# Altium PCB CL-HC-V2.0.PcbDoc (part 1 of 3)
Units mil, origin at the board's own origin, x right, y up, seen from the top; angles counter-clockwise.
Board outline 12846.15 x 9153.85 mil, 2 copper layers (TopLayer, BottomLayer); 137 components, 528 nets, 534 pads, 1 vias.
Unrouted connection lines stored in the file: 27.
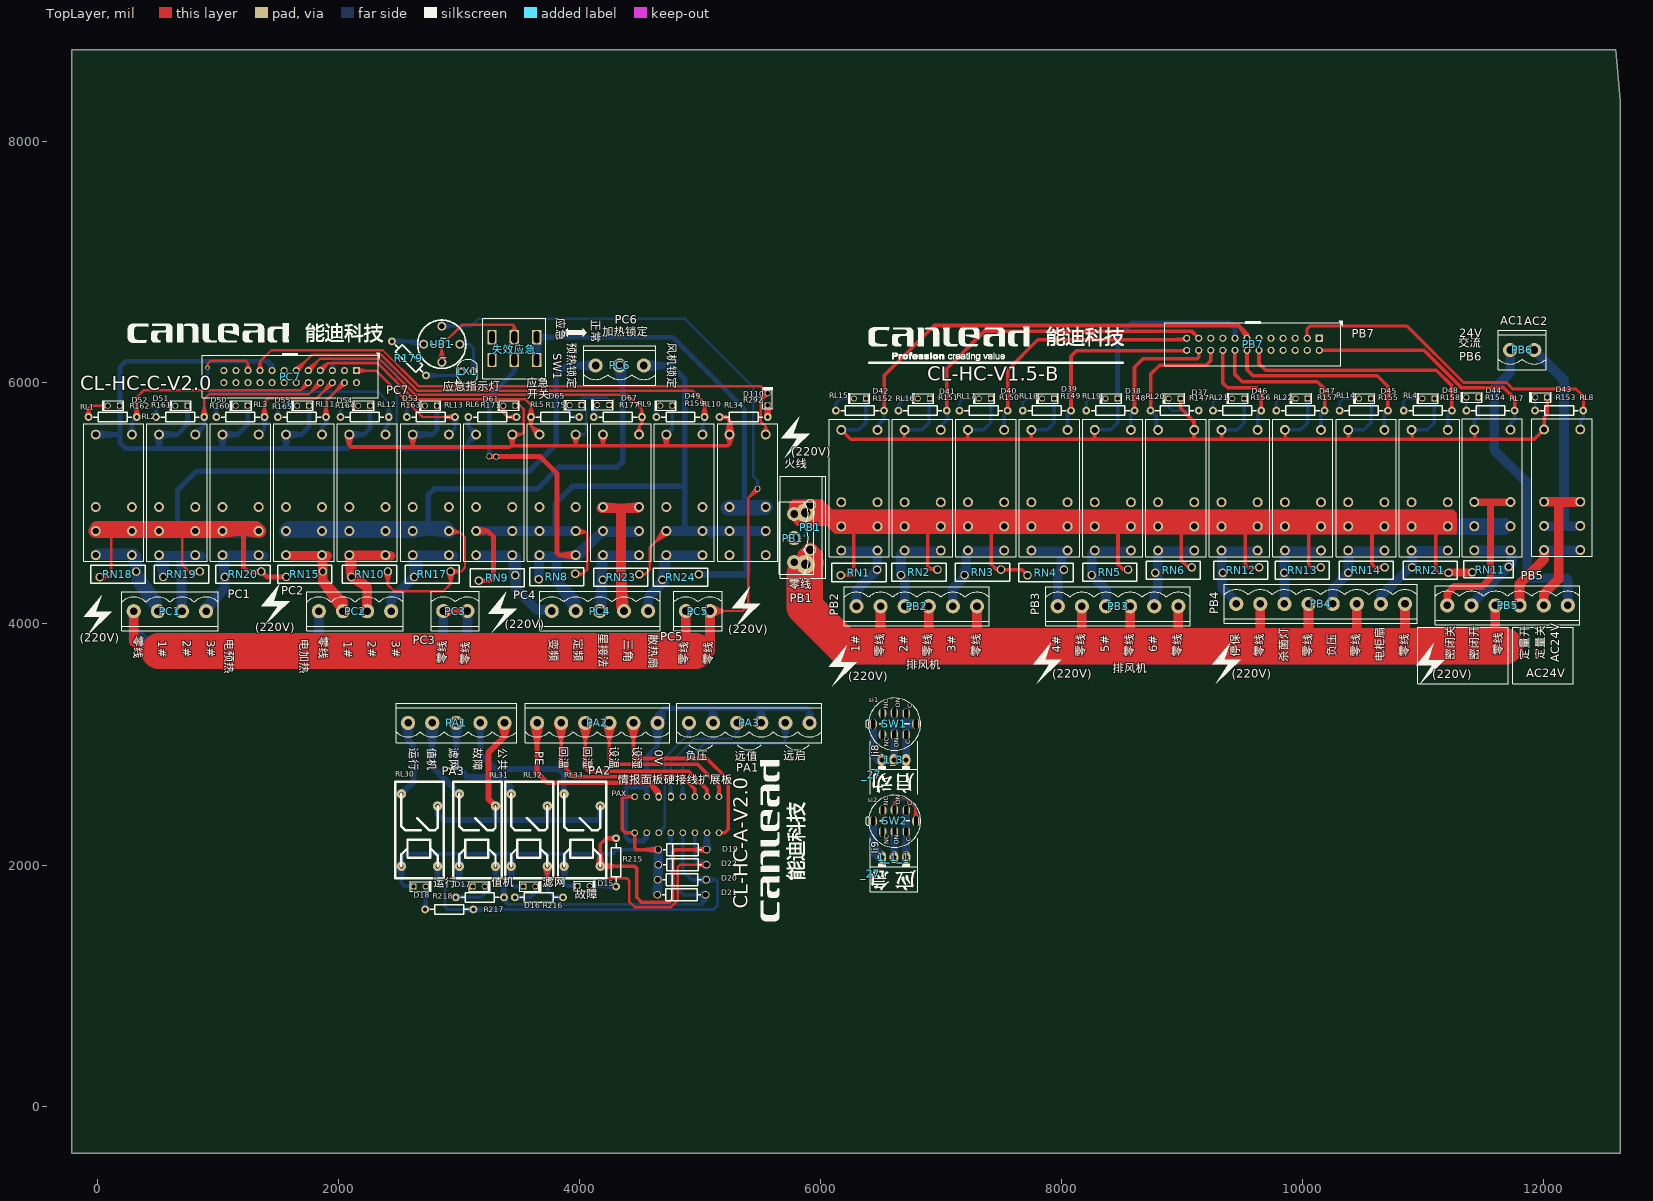
[diagram p0: TopLayer view]
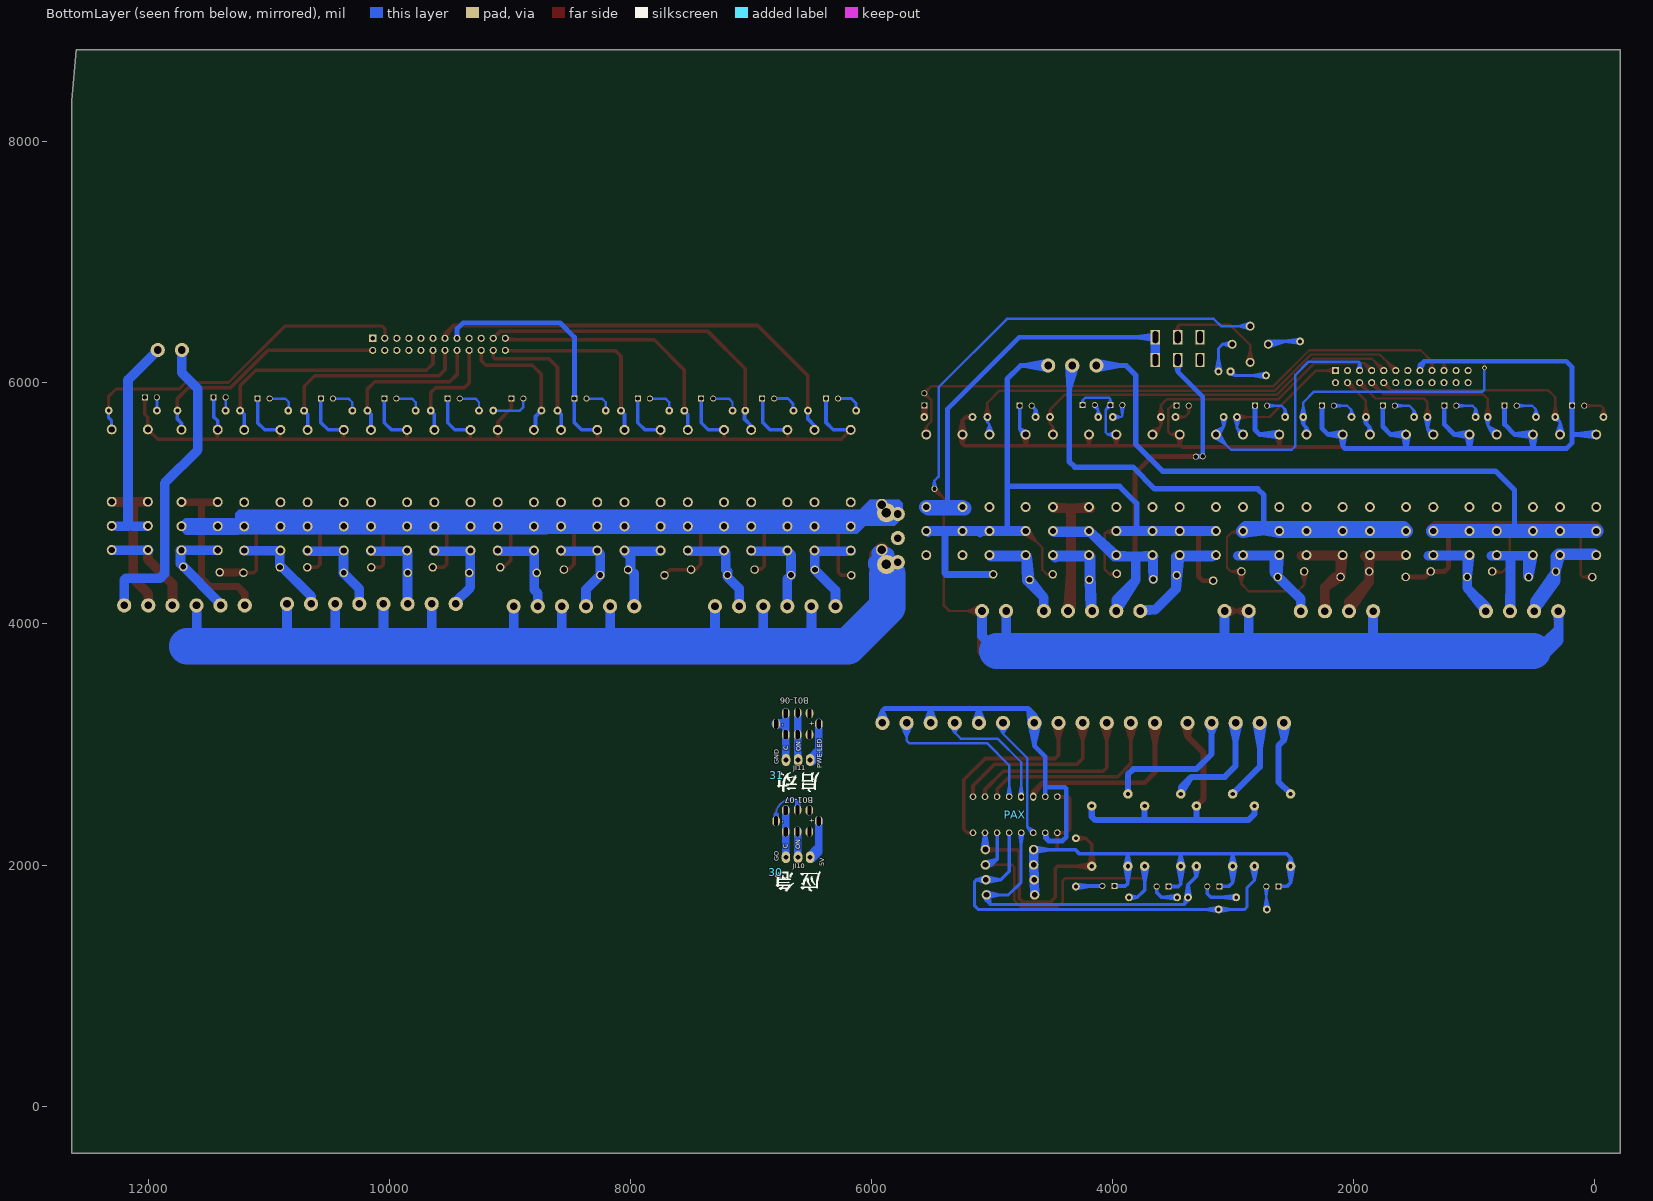
[diagram p1: BottomLayer view, seen from below]

## Layer stack, top to bottom
TopSolder: solder mask 0.4, Solder Resist, Dk 3.5
TopLayer: signal copper 1.4
Dielectric1: dielectric 12.6, FR-4, Dk 4.8
BottomLayer: signal copper 1.4
BottomSolder: solder mask 0.4, Solder Resist, Dk 3.5

## Board outline
12597.31,8763.6 -210.38,8763.6 -210.38,-390.24 12635.77,-390.24 12635.77,8340.52

## Design rules (kind name [scope] priority, off if disabled: settings)
Clearance Clearance_1 [All] p1 off: gap=30
Clearance [All] p2: gap=15
ComponentClearance [All] p1 off: gap=10 collisioncheckmode=3 verticalgap=10 showdistances=FALSE
FabricationTestPointUsage TestPointUsage [All] p1: valid=0 allowmultiple=FALSE
FabricationTestpoint Testpoint [All] p1: side=3 testpointundercomponent=TRUE minsize=40 maxsize=100 preferedsize=60 minholesize=20 maxholesize=40 preferedholesize=32 testpointgrid=1 allowsidetop=TRUE allowsidebottom=TRUE usegrid=TRUE gridtolerance=0.01
PolygonConnect PolygonConnect_1 [All vs (InPadClass('All Pads'))] p1: connectstyle=NoConnect reliefconductorwidth=10 reliefentries=4 polygonreliefangle="90 Angle" airgapwidth=10
PolygonConnect [All] p2: connectstyle=Direct reliefconductorwidth=10 reliefentries=4 polygonreliefangle="90 Angle" airgapwidth=10
RoomDefinition patch [InComponentClass('patch')] p1: confinementstyle=ConfineIn formatcopy=TRUE lockcomponents=FALSE outline -2150,7720.31 -950,7720.31 -950,4279.31 -2150,4279.31
RoomDefinition Lights [InComponentClass('Lights')] p2: confinementstyle=ConfineIn formatcopy=TRUE lockcomponents=FALSE outline 14197.83,3159.45 15242.13,3159.45 15242.13,3920.28 14197.83,3920.28
RoomDefinition MCU单片机 [InComponentClass('MCU单片机')] p3: confinementstyle=ConfineIn formatcopy=TRUE lockcomponents=FALSE outline 15430.12,9928.15 13948.82,9928.15 13948.82,10710.63 15430.12,10710.63
RoutingVias [All] p1: holewidth=24 width=40 viastyle="Through Hole" minholewidth=24 minwidth=40 maxholewidth=24 maxwidth=40
SilkToSolderMaskClearance SilkscreenOverComponentPads [IsPad] p1: minsilkscreentomaskgap=10 clearancetoexposedcopper=TRUE
SolderMaskExpansion [All] p1: expansion=4
Width [All] p1: maxlimit=300 minlimit=10 preferedwidth=30
25 further rules are at their usual default settings.

## Classes and differential pairs
component class Lights: D74 Q11 R118 R194 RN22 Y1 Y2
component class MCU单片机: 1 24V C1 C2 C3 C4 C5 C6 C7 C8 C19 C20 C29 C30 C31 C32 C34 C35 CU1 D1 D2 D3 F F2 P P1 R1 R2 R3 R4 R5 R6 R7 R8 R9 R11 R12 R13 R35 R79 U1 VR1 ѹ? 冷/自/热 定频/变频 客户接线自动门1 情报面 星/三角 电柜内部1 电柜内部2 电柜风扇

## Components (designator, comment, footprint, x,y, rotation, side; value= is the part's Value field where it differs from the comment)
1_1_1 "J15" 3p 6610.71,2103.68 r180 top
1_3 "J15" 3p 6610.32,2910.76 r180 top
30 "" place-han_zi_z 6793.7,1938.87 r180 bottom
31 "" place-han_zi_z 6785.83,2745.96 r180 bottom
_27 "" place-han_zi_z 6427.56,2749.9 r0 top
_27 "" place-han_zi_z 6419.68,1927.06 r0 top
D15 "" RT_LED1 4035.83,1826.11 r180 top (schematic designator D64)
D16 "" RT_LED1 3585.83,1822.22 r180 top (schematic designator D63)
D17 "" RT_LED1 3165.83,1822.74 r180 top (schematic designator D62)
D18 "" RT_LED1 2675.83,1822.74 r180 top (schematic designator D59)
D19 "1n4007" DIODEAK 4856.28,2128.21 r180 top (schematic designator D70)
D20 "1n4007" DIODEAK 4852.32,1877.75 r180 top (schematic designator D69)
D21 "1n4007" DIODEAK 4848.08,1752.53 r180 top (schematic designator D4)
D22 "1n4007" DIODEAK 4856.28,2001.4 r180 top (schematic designator D68)
D37 "GREEN" RT_LED1 8938.5,5869.33 r0 top
D38 "GREEN" RT_LED1 8415.4,5869.33 r0 top
D39 "GREEN" RT_LED1 7889.77,5869.33 r0 top
D40 "GREEN" RT_LED1 7364.14,5869.33 r0 top
D41 "GREEN" RT_LED1 6858.5,5869.33 r0 top
D42 "RED" RT_LED1 6328.5,5869.33 r0 top
D43 "GREEN" RT_LED1 11978.5,5879.33 r0 top
D44 "GREEN" RT_LED1 11408.5,5879.33 r0 top
D45 "GREEN" RT_LED1 10517.93,5869.33 r0 top
D46 "" RT_LED1 9466.67,5869.33 r0 top
D47 "GREEN" RT_LED1 9992.3,5869.33 r0 top
D48 "GREEN" RT_LED1 11043.56,5869.33 r0 top
D49 "GREEN" RT_LED1 4722.2,5810 r0 top locked
D50 "GREEN" RT_LED1 1200,5810 r0 top locked
D51 "" RT_LED1 700,5810 r0 top locked
D52 "GREEN" RT_LED1 140,5810 r0 top locked
D53 "GREEN" RT_LED1 2770,5810 r0 top locked
D54 "GREEN" RT_LED1 2215.64,5810 r0 top locked
D55 "GREEN" RT_LED1 1710,5810 r0 top locked
D61 "GREEN" RT_LED1 3420,5810 r0 top locked
D65 "GREEN" RT_LED1 3970,5815 r0 top locked
D67 "GREEN" RT_LED1 4199.27,5815.92 r0 top locked
D110 "GREEN" RT_LED1 5563.38,5863.45 r270 top
LX1 "" LEDA 3023.66,6094.87 r180 top locked (schematic designator 红?)
PA1 "情报面板与电柜输入" pl5x 2980.44,3178.9 r0 top (schematic designator 外?)
PA2 "模拟-硬连接" PL6X 4150.11,3178.9 r180 top (schematic designator 外?)
PA3 "外接情报面板接口1" PL6X 5410.44,3178.9 r0 top
PAX "Header 8X2" centipede-16 4809.58,2417.3 r90 bottom (schematic designator P19)
PB1 "硬接线" 95-2P 5915.74,4614.99 r90 top (schematic designator AC24Vin2)
PB1' "硬接线" PL3X 5782.6,4512.08 r90 top (schematic designator 客户接线1)
PB2 "Header 6" PL6X 6799.43,4146.34 r0 top (schematic designator 客户接线2)
PB3 "Header 6" PL6X 8469.43,4146.34 r0 top (schematic designator 客户接线3)
PB4 "Header 8" PL8X 10149.43,4166.34 r0 top (schematic designator 杀菌/停保)
PB5 "硬接线" PL6X 11700.08,4153.96 r0 top (schematic designator 客接新?)
PB6 "硬接线" PL2X 11821.07,6272.28 r180 top (schematic designator AC24Vin2)
PB7 "Con2*12-1mm" FC24LX 9588.5,6319.33 r180 top (schematic designator P21)
PC1 "Header 4" PL4X 605.12,4105.93 r0 top locked (schematic designator 再热)
PC2 "Header 4" PL4X 2140.12,4105.93 r0 top locked (schematic designator 预热)
PC3 "硬接线" PL2X 2972.64,4106.99 r180 top locked (schematic designator P24)
PC4 "硬接线" PL5X 4171.46,4106.99 r180 top locked (schematic designator 送风机)
PC5 "硬接线" PL2X 4984.85,4106.99 r180 top locked (schematic designator P24)
PC6 "Header 3" PL3X 4135.83,6143.7 r0 top locked (schematic designator 火线)
PC7 "Con2*12-1mm" FC24LX 1602.35,6051.59 r180 top (schematic designator P21)
R147 "15K" AXIAL0.4 9138.5,5769.33 r180 top
R148 "15K" AXIAL0.4 8205.93,5769.7 r0 top
R149 "15K" AXIAL0.4 7679.77,5769.33 r0 top
R150 "15K" AXIAL0.4 7154.14,5769.33 r0 top
R151 "15K" AXIAL0.4 6649.03,5769.33 r0 top
R152 "15K" AXIAL0.4 6129.03,5769.7 r0 top
R153 "15K" AXIAL0.4 11929.03,5770.06 r0 top
R154 "15K" AXIAL0.4 11359.03,5769.7 r0 top
R155 "15K" AXIAL0.4 10307.93,5769.33 r0 top
R156 "15K" AXIAL0.4 9257.19,5769.7 r0 top
R157 "15K" AXIAL0.4 9782.82,5769.7 r0 top
R158 "15K" AXIAL0.4 10839.03,5769.7 r0 top
R159 "15K" AXIAL0.4 4640.38,5716.68 r0 top locked
R160 "15K" AXIAL0.4 990.38,5716.68 r0 top locked
R161 "15K" AXIAL0.4 490.38,5716.68 r0 top locked
R162 "15K" AXIAL0.4 -69.62,5716.68 r0 top locked
R163 "15K" AXIAL0.4 2570.38,5716.68 r0 top locked
R164 "15K" AXIAL0.4 2020.38,5716.68 r0 top locked
R165 "15K" AXIAL0.4 1500.38,5716.68 r0 top locked
R171 "15K" AXIAL0.4 3479.48,5715.94 r180 top locked
R175 "15K" AXIAL0.4 3999.83,5715.94 r180 top locked
R177 "15K" AXIAL0.4 4120.52,5716.68 r0 top locked
R179 "51K 2512 1W" AXIAL0.4 2728.33,6061.31 r135 top locked
R215 "15K" AXIAL0.4 4305.47,1822.75 r90 top (schematic designator R174)
R216 "15K" AXIAL0.4 3466.36,1732.59 r0 top (schematic designator R173)
R217 "15K" AXIAL0.4 2976.36,1732.59 r0 top (schematic designator R172)
R218 "15K" AXIAL0.4 2722.34,1632.59 r0 top (schematic designator R169)
R292 "15K" AXIAL0.4 5163.91,5716.68 r0 top locked
RL1 "三级预热" HF115-5#1 139.33,5070.44 r0 top locked
RL2 "二级预热" HF115-5#1 665.21,5070.44 r0 top locked
RL3 "一级预热" HF115-5#1 1191.08,5070.44 r0 top locked
RL4 "送风机散热风扇" HF115-5#1 11054.09,5109.8 r0 top
RL5 "送风机定频起停" HF115-5#1 3820.45,5070.44 r0 top locked
RL6 "送风机变频起停" HF115-5#1 3294.58,5070.44 r0 top locked
RL7 "新风密闭执行" HF115-5#1 11574.12,5110.92 r0 top
RL8 "新风定量执行" HF115-5#1 12153.49,5113.54 r0 top
RL9 "星三角切换" HF115-5#1 4346.32,5070.44 r0 top locked
RL10 "电柜散热风扇" HF115-5#1 4872.2,5070.44 r0 top locked
RL11 "三级再热" HF115-5#1 1716.95,5070.44 r0 top locked
RL12 "二级再热" HF115-5#1 2242.83,5070.44 r0 top locked
RL13 "一级再热" HF115-5#1 2768.7,5070.44 r0 top locked
RL14 "负压排风" HF115-5#1 10528.46,5109.8 r0 top
RL15 "6#排风机" HF115-5#1 6323.4,5109.8 r0 top
RL16 "5#排风机" HF115-5#1 6849.03,5109.8 r0 top
RL17 "4#排风机" HF115-5#1 7374.67,5109.8 r0 top
RL18 "3#排风机" HF115-5#1 7900.3,5109.8 r0 top
RL19 "2#排风机" HF115-5#1 8425.93,5109.8 r0 top
RL20 "1#排风机" HF115-5#1 8951.56,5109.8 r0 top
RL21 "停机保护" HF115-5#1 9477.2,5109.8 r0 top
RL22 "杀菌灯" HF115-5#1 10002.83,5109.8 r0 top
RL30 "POL->运行监控" RELAY12V 2425.1,2590.09 r270 top (schematic designator RL33)
RL31 "POL->值机监控" RELAY12V 2905.83,2590.09 r270 top (schematic designator RL32)
RL32 "POL->加湿电磁阀" RELAY12V 3335.5,2590.09 r270 top (schematic designator RL31)
RL33 "POL->加湿电磁阀" RELAY12V 3774.22,2590.09 r270 top (schematic designator RL30)
RL34 "星三角切换" HF115-5#2 5396.7,5070.44 r180 top locked
RN1 "1D471" RAD0.3#1 6319.43,4426.34 r180 top
RN2 "1D471" RAD0.3#1 6819.93,4428.06 r0 top
RN3 "1D471" RAD0.3#1 7347.05,4428.06 r0 top
RN4 "1D471" RAD0.3#1 7869.43,4426.34 r180 top
RN5 "1D471" RAD0.3#1 8401.28,4428.06 r0 top
RN6 "1D471" RAD0.3#1 8929.43,4446.34 r0 top
RN8 "1D471" RAD0.3#1 3814.63,4393.07 r0 top locked
RN9 "1D471" RAD0.3#1 3318.25,4381.59 r180 top locked
RN10 "1D471" RAD0.3#1 2261.7,4412.39 r0 top locked
RN11 "1D471" RAD0.3#1 11558.45,4450.9 r180 top
RN12 "1D471" RAD0.3#1 9489.43,4446.34 r0 top
RN13 "1D471" RAD0.3#1 9999.43,4446.34 r0 top
RN14 "1D471" RAD0.3#1 10529.43,4446.34 r0 top
RN15 "1D471" RAD0.3#1 1721.7,4412.39 r180 top locked
RN17 "1D471" RAD0.3#1 2781.7,4412.39 r0 top locked
RN18 "1D471" RAD0.3#1 173.13,4411.74 r180 top locked
RN19 "1D471" RAD0.3#1 701.7,4412.39 r0 top locked
RN20 "1D471" RAD0.3#1 1211.7,4412.39 r0 top locked
RN21 "1D471" RAD0.3#2 11059.43,4446.34 r0 top
RN23 "1D471" RAD0.3#1 4346.39,4388.31 r0 top locked
RN24 "1D471" RAD0.3#1 4841.02,4388.31 r0 top locked
SW1 "Comment" SW-LARGE 6614.96,3171.75 r0 top
SW2 "Comment" SW-LARGE 6615.75,2366.23 r0 top
UB1 "DB107S" BRI-W04 2860,6320 r0 top locked (schematic designator U1X)
失效应急 "Header 6" SEL220V 3461.43,6284.2 r0 top locked

## Footprints (in the part's own frame and the unit in brackets; to place one, negate y for a bottom-side part, rotate by r counter-clockwise, add the part's x,y. Pads: shape width x height; smd on the part's side, far side on the other; paste and mask are expansions set on the pad)
3p [mm]
  oval 1.8x2.5 hole 1: +(2.54,1) -(-2.54,1) ON(0,1)
  silkscreen extent -5,-3 5,3
95-2P [mm]
  round 2.5 hole 1.8: 1(0,0) 2(9.5,0)
  silkscreen extent -6,-3.3 15.5,6.28
AXIAL0.4 [mil]
  round 65 hole 32: 1(-0.52,-0.37) 2(399.48,-0.37)
  silkscreen extent 39,-40 359,40, body extent -12,-45 412,46, height 116
BRI-W04 [mil]
  round 75 hole 45: 1(0,150) 2(0,-150) 3(-150,0) 4(150,0)
  silkscreen extent -200,-200 200,200
centipede-16 [mil]
  round 55 hole 36: 1(150,-350) 2(-150,-350) 3(150,-250) 4(-150,-250) 6(-150,-150) 8(-150,-50) 9(150,50) 10(-150,50) 11(150,150) 12(-150,150) 13(150,250) 14(-150,250) 15(150,350) 16(-150,350)
  oval 70x50 hole 36: 5(150,-150) 7(150,-50)
DIODEAK [mm]
  round 1.6 / inner round 1.6 / far side round 2 hole 1.2: A(-5.08,0) K(5.08,0)
  silkscreen extent -4.06,-1.27 4.06,1.27, body extent -5.53,-1.3 5.53,1.3, height 3.3
FC24LX [mm]
  rect 1.5x1.5 hole 0.9: 1(-13.97,-1.27)
  round 1.5 hole 0.9: 2(-13.97,1.27) 3(-11.43,-1.27) 4(-11.43,1.27) 5(-8.89,-1.27) 6(-8.89,1.27) 7(-6.35,-1.27) 8(-6.35,1.27) 9(-3.81,-1.27) 10(-3.81,1.27) 11(-1.27,-1.27) 12(-1.27,1.27) 13(1.27,-1.27) 14(1.27,1.27) 15(3.81,-1.27) 16(3.81,1.27) 17(6.35,-1.27) 18(6.35,1.27) 19(8.89,-1.27) 20(8.89,1.27) 21(11.43,-1.27) 22(11.43,1.27) 23(13.97,-1.27) 24(13.97,1.27)
  silkscreen extent -18.9,-5.01 18.54,4.5
HF115-5#1 [mm]
  round 2.1 hole 1.3: 1(-3.81,12.7) 2(3.81,12.7) 3(-3.81,-12.7) 3(3.81,-12.7) 4(-3.81,-7.62) 4(3.81,-7.62) 5(-3.81,-2.54) 5(3.81,-2.54)
  silkscreen extent -6.37,-14.01 6.33,14.99
HF115-5#2 [mm]
  round 2.1 hole 1.3: 1(-3.81,-12.7) 2(3.81,-12.7) 3(-3.81,12.7) 3(3.81,12.7) 4(-3.81,7.62) 4(3.81,7.62) 5(-3.81,2.54) 5(3.81,2.54)
  silkscreen extent -6.37,-14.99 6.33,14.01
LEDA [mil]
  oct 65x65 hole 32: A(0,0)
  round 65 hole 32: K(-100,0)
  silkscreen extent -131,-98 46,99
PL2X [mm]
  round 3 hole 1.6: 1(-2.54,0) 2(2.54,0)
  silkscreen extent -5.08,-4.13 5.08,4.13
PL3X [mm]
  round 3 hole 1.6: 1(0,0) 2(5.08,0) 3(10.16,0)
  silkscreen extent -2.54,-4.13 12.7,3.18
PL4X [mm]
  round 3 hole 1.6: 1(-7.62,0) 2(-2.54,0) 3(2.54,0) 4(7.62,0)
  silkscreen extent -10.16,-4.13 10.16,4.13
pl5x [mm]
  round 3 hole 1.6: 1(-10.16,0) 2(-5.08,0) 3(0,0) 4(5.08,0) 5(10.16,0)
  silkscreen extent -12.7,-4.13 12.7,4.13
PL5X [mm]
  round 3 hole 1.6: 1(-10.16,0) 2(-5.08,0) 3(0,0) 4(5.08,0) 5(10.16,0)
  silkscreen extent -12.7,-4.13 12.7,4.13
PL6X [mm]
  round 3 hole 1.6: 1(-12.7,0) 2(-7.62,0) 3(-2.54,0) 4(2.54,0) 5(7.62,0) 6(12.7,0)
  silkscreen extent -15.24,-4.13 15.24,4.13
PL8X [mm]
  round 3 hole 1.6: 1(-17.78,0) 2(-12.7,0) 3(-7.62,0) 4(-2.54,0) 5(2.54,0) 6(7.62,0) 7(12.7,0) 8(17.78,0)
  silkscreen extent -20.32,-4.13 20.32,4.13
place-han_zi_z [mil]
RAD0.3#1 [mm]
  round 1.8 hole 1.2: 1(3.84,0.58) 2(-3.84,-0.58)
  silkscreen extent -5.76,-1.91 5.67,1.91
RAD0.3#2 [mm]
  round 1.8 hole 1.2: 1(3.84,-0.58) 2(-3.84,0.58)
  silkscreen extent -5.76,-1.91 5.67,1.91
RELAY12V [mm]
  round 2 hole 0.9: 1(15.24,2.54) 2(15.24,10.16) 3(0,2.54) 4(2.54,10.16)
  silkscreen extent -2.54,1.27 17.78,11.43
RT_LED1 [mil]
  rect 50x50 hole 36: A(50,0)
  round 50 hole 36: K(-50,0)
  silkscreen extent -100,-44 84,44, body extent -84,-44 84,44, height 236
SEL220V [mm]
  rect 2x3 hole 1.2 slot 2.5 at 90 deg: 1(-4.7,-2.4) 2(0,-2.4) 3(4.7,-2.4) 4(-4.7,2.4) 5(0,2.4) 6(4.7,2.4)
  silkscreen extent -6.6,-6.4 6.6,6.4
SW-LARGE [mm]
  oval 1.6x2.1 hole 0.8 slot 2 at 90 deg: 0(-2.53,2.205) 1(-0.03,2.305) 2(2.47,2.205) 3(-2.53,-2.295) 4(-0.03,-2.295) 5(2.47,-2.295) 6(-4.5,-0.045) 7(4.5,-0.035)
  silkscreen extent -5.93,-5.56 5.51,5.44

## Part data
D15 D16 D17 D18 D37 D38 D39 D40 D41 D42 D43 D44 D45 D46 D47 D48 D49 D50 D51 D52 D53 D54 D55 D61 D65 D67 D110: library part LED, "Zener Diode"
D19 D20 D21 D22: library part DIODE, "Diode"
PA1: library part "Header 5", "Header, 5-Pin"
PA2 PA3: library part "Header 6", "Header, 6-Pin"
PAX: "Header, 8-Pin, Dual"
PC3 PC5: library part "Header 2", "Header, 2-Pin"
R147 R148 R149 R150 R151 R152 R153 R154 R155 R156 R157 R158 R159 R160 R161 R162 R163 R164 R165 R171 R175 R177 R179 R215 R216 R217 R218 R292: library part RES2
RL1 RL2 RL3 RL4 RL5 RL6 RL10 RL11 RL12 RL13 RL14 RL15 RL16 RL17 RL18 RL19 RL20 RL21 RL22 RL30 RL31 RL32 RL33: library part RELAY
RL34: library part HF3FF
RN1 RN2 RN3 RN4 RN5 RN6 RN8 RN9 RN10 RN11 RN12 RN13 RN14 RN15 RN17 RN18 RN19 RN20 RN21 RN23 RN24: library part RN
UB1: library part Bridge
失效应急: "Header, 6-Pin"

## Free pads (board coordinates)
  round 50 hole 36: 0(3253.63,5389.81) 1(3310.78,5387.45) 2(5479.2,5120.42)
  round 157.48 hole 78.74: 0(5876.88,4493.05) 0(5876.88,4922.18)
  round 65 hole 36: 0(11427.56,5602.53)

## Via types
v1: diameter 40, hole 24, TopLayer to BottomLayer, tented both sides, 1 vias

## Nets (pads, with @x,y where several pads share a name; then routed paths per layer and width w, separated by ;. In a path a pad name is that pad's centre, name@x,y a point inside that pad or via, vN(x,y) a via of type N, cw(c..) or ccw(c..) an arc to the next point about the centre after c; other vN are vias at no path point)
1C2: PC4.5 RL6.3 RN9.2 | length 2620.2
  BottomLayer w80: RL6.3@3144.58,4570.44 RL6.3@3429.84,4559.16 ; RL6.3@3161.15,4569.79 RL6.3@3444.58,4570.44 ; PC4.5@3771.02,4118.31 3646.66,4118.31 ; PC4.5@3771.46,4106.99 3646.66,4118.31 ; RL6.3@3444.58,4570.44 RN9.2@3469.44,4404.42 ; RL6.3@3444.58,4570.44 3475.47,4289.49 ; RL6.3@3444.58,4570.44 3175.47,4559.16 RL6.3@3475.47,4559.16 ; RN9.2@3469.44,4404.42 RL6.3@3475.47,4559.16 ; RN9.2@3469.44,4404.42 3475.47,4289.49 ; 3475.47,4289.49 RL6.3@3475.47,4559.16 ; 3475.47,4289.49 3646.66,4118.31
1C3: pad.0@3253.63,5389.81 pad.1 PC4.4 RL5.3 RL9.4 RN8.2 失效应急.2 | length 8237.8
  TopLayer w40: 3398.63,5389.8 pad.0@3253.63,5389.81 pad.1@3310.78,5387.45 ; 3455.88,5389.8 pad.1@3310.78,5387.45 ; RL5.3@3968.79,4549.17 3833.34,4570.44 ; RL5.3@3968.79,4591.72 3833.34,4570.44 ; RL5.3@3970.45,4570.44 3833.34,4570.44 ; pad.1@3310.78,5387.45 pad.0@3253.63,5389.81 3673.36,5389.8 3814.32,5248.84 3814.32,4589.47 3833.34,4570.44
  BottomLayer w39.37: 3253.62,5532.92 pad.0@3253.63,5389.81 ; 失效应急.2@3441.9,6167.58 3461.43,6090.96 ; 失效应急.2@3461.43,6170.03 3461.43,6090.96 ; 失效应急.2@3461.43,6189.71 3461.43,6090.96 ; 失效应急.2@3480.96,6167.58 3461.43,6090.96 ; pad.0@3253.63,5389.81 3308.42,5389.81 pad.1@3310.78,5387.45 pad.0@3253.63,5389.81 ; pad.0@3253.63,5389.81 3253.62,5883.15 3461.43,6090.96
  BottomLayer w80: RL5.3@3659.16,4559.26 RL5.3@3661.02,4557.4 ; PC4.4@3971.02,4118.31 3971.02,4201.54 ; RL5.3@3975.31,4574.72 RL9.4@4196.32,4770.44 ; RL5.3@3985.17,4559.56 RL9.4@4196.32,4770.44 ; RL9.4@4195.63,4770.01 RL9.4@4184.87,4759.26 ; RL9.4@4213.45,4759.26 RL9.4@4496.32,4770.44 ; RL9.4@4478.52,4759.26 RL9.4@4196.32,4770.44 ; RL9.4@4479.91,4769.79 RL9.4@4196.32,4770.44 ; RL9.4@4484.87,4759.26 RL9.4@4184.87,4759.26 ; RL5.3@3661.02,4557.4 3662.88,4559.26 3817.54,4559.26 ; RL5.3@3661.02,4557.4 RL5.3@3663.45,4554.97 ; RN8.2@3663.45,4370.23 RL5.3@3663.45,4554.97 ; RN8.2@3663.45,4370.23 RL5.3@3670.45,4570.44 ; RN8.2@3663.45,4370.23 RL5.3@3663.45,4554.97 ; RN8.2@3663.45,4370.23 RL5.3@3670.45,4570.44 ; RL5.3@3670.45,4570.44 3817.54,4559.26 ; 3807.92,4364.63 3807.92,4549.64 3817.54,4559.26 ; 3807.92,4364.63 3971.02,4201.54 ; 3807.92,4364.63 PC4.4@3971.46,4106.99 ; 3817.54,4559.26 3984.87,4559.26 RL9.4@4184.87,4759.26 ; 3817.54,4559.26 RL5.3@3970.45,4570.44 RL9.4@4184.87,4759.26 ; 3971.02,4201.54 PC4.4@3971.46,4106.99 ; 3971.02,4201.54 PC4.4@3971.46,4106.99
1C6: PB4.7 RL4.3 RN21.2 | length 848.7
  BottomLayer w80: PB4.7@10649.43,4166.34 10649.43,4230.28 10909.59,4490.44 10909.59,4607.29 RL4.3@11209.59,4607.29
1C7: PC1.4 RL3.3 RN20.2 | length 2184.2
  BottomLayer w80: PC1.4@900.51,4139.25 1060.52,4299.26 ; PC1.4@905.12,4105.93 1060.52,4299.26 ; RL3.3@1059.5,4570.22 RL3.3@1341.08,4570.44 ; RL3.3@1322.53,4566.99 RL3.3@1041.08,4570.44 ; RL3.3@1041.08,4570.44 1084.49,4566.99 ; RL3.3@1041.08,4570.44 RN20.2@1060.52,4389.56 ; RL3.3@1041.08,4570.44 1084.49,4566.99 ; 1060.52,4299.26 RN20.2@1060.52,4389.56 ; RN20.2@1060.52,4389.56 1060.52,4543.02 1084.49,4566.99 ; 1084.49,4566.99 1384.49,4566.99 RL3.3@1341.08,4570.44 ; 1084.49,4566.99 RL3.3@1341.08,4570.44
1C8: PC1.3 RL2.3 RN19.2 | length 2167.6
  BottomLayer w80: PC1.3@700.51,4139.25 700.51,4566.99 ; 700.51,4405.3 PC1.3@705.12,4105.93 ; RL2.3@515.21,4570.44 700.51,4566.99 ; RL2.3@515.21,4570.44 558.85,4566.99 ; RL2.3@515.21,4570.44 558.85,4566.99 ; RL2.3@515.21,4570.44 558.85,4397.9 558.85,4566.99 ; RL2.3@515.21,4570.44 RN19.2@550.52,4389.56 558.85,4566.99 ; 558.85,4566.99 700.51,4566.99 ; 700.51,4566.99 858.85,4566.99 RL2.3@815.21,4570.44 700.51,4566.99
1C9: PC1.2 RL1.3 RN18.2 | length 3415.8
  BottomLayer w80: RL1.3@-10.67,4570.44 RL1.3@273.28,4583.78 ; RL1.3@4.99,4571.18 RL1.3@289.33,4570.44 ; RL1.3@6.2,4583.78 306.2,4583.78 RL1.3@328.25,4561.73 ; RL1.3@6.89,4583.78 RL1.3@289.33,4570.44 ; 356.43,4388.95 PC1.2@505.12,4105.93 ; PC1.2@500.51,4139.25 500.51,4184.25 ; RL1.3@289.33,4570.44 RN18.2@328.25,4429.38 ; RL1.3@289.33,4570.44 RN18.2@324.31,4434.58 ; 324.31,4360.45 324.31,4397.18 ; 324.31,4360.45 500.51,4184.25 ; 324.31,4360.45 RN18.2@324.31,4434.58 ; 324.31,4360.45 PC1.2@505.12,4105.93 ; 324.31,4397.18 RN18.2@324.31,4434.58 ; 324.31,4397.18 328.25,4401.11 RN18.2@328.25,4429.38 ; 324.31,4397.18 RN18.2@324.31,4434.58 ; RN18.2@324.31,4434.58 RL1.3@328.25,4561.73 ; RN18.2@324.31,4434.58 500.51,4184.25 ; RN18.2@328.25,4429.38 RL1.3@328.25,4561.73 ; 500.51,4184.25 PC1.2@505.12,4105.93 ; 500.51,4184.25 PC1.2@505.12,4105.93 ; 500.51,4184.25 PC1.2@505.12,4105.93
1C10: PC2.4 RL13.3 RN17.2 | length 2878.6
  BottomLayer w80: PC2.4@2440.12,4105.93 2441.7,4208.79 ; PC2.4@2441.7,4112.39 2441.7,4208.79 ; RL13.3@2900.15,4566.99 RL13.3@2618.7,4570.44 ; 2441.7,4208.79 2661.38,4428.48 ; 2441.7,4208.79 RN17.2@2630.52,4389.56 ; RL13.3@2618.7,4570.44 2661.38,4566.99 ; RL13.3@2618.7,4570.44 2661.38,4428.48 ; RL13.3@2618.7,4570.44 2661.38,4566.99 ; RL13.3@2618.7,4570.44 RL13.3@2918.7,4570.44 ; RL13.3@2618.7,4570.44 2661.38,4566.99 ; RL13.3@2618.7,4570.44 RN17.2@2630.52,4389.56 ; RN17.2@2630.52,4389.56 2661.38,4566.99 ; RN17.2@2630.52,4389.56 2661.38,4428.48 ; RN17.2@2630.52,4389.56 2661.38,4428.48 ; RN17.2@2630.52,4389.56 2661.38,4428.48 ; 2661.38,4428.48 2661.38,4566.99 ; 2661.38,4566.99 2961.38,4566.99 RL13.3@2918.7,4570.44 ; 2661.38,4566.99 RL13.3@2918.7,4570.44
1C11: PC2.3 RL12.3 RN10.2 | length 2624.8
  TopLayer w80: PC2.3@2240.12,4105.93 2241.7,4303.67 ; PC2.3@2241.7,4107.69 2241.7,4303.67 ; RL12.3@2374.28,4566.99 RL12.3@2092.83,4570.44 ; RL12.3@2092.83,4570.44 2135.75,4566.99 ; RL12.3@2092.83,4570.44 2135.75,4566.99 ; RL12.3@2092.83,4570.44 RN10.2@2110.52,4389.56 ; RL12.3@2092.83,4570.44 RL12.3@2392.83,4570.44 ; RL12.3@2092.83,4570.44 2135.75,4566.99 ; RL12.3@2092.83,4570.44 RN10.2@2110.52,4389.56 ; RN10.2@2110.52,4389.56 2155.81,4389.56 ; RN10.2@2110.52,4389.56 2110.52,4541.75 2135.75,4566.99 ; RN10.2@2110.52,4389.56 2241.7,4303.67 ; RN10.2@2110.52,4389.56 2155.81,4389.56 ; 2135.75,4566.99 2435.75,4566.99 RL12.3@2392.83,4570.44 ; 2135.75,4566.99 RL12.3@2392.83,4570.44 ; 2155.81,4389.56 2241.7,4303.67
1C12: PC2.2 RL11.3 RN15.2 | length 1861.7
  TopLayer w80: PC2.2@2041.7,4107.69 2041.7,4183.06 ; 1769.05,4566.99 1910.12,4566.99 ; 1769.05,4566.99 1610.12,4566.99 RL11.3@1566.95,4570.44 1769.05,4566.99 ; 1769.05,4566.99 RL11.3@1866.95,4570.44 ; RL11.3@1866.95,4570.44 RN15.2@1872.88,4435.23 ; RL11.3@1866.95,4570.44 1910.12,4566.99 ; RL11.3@1866.95,4570.44 1910.12,4566.99 ; 1872.88,4351.88 RN15.2@1872.88,4435.23 ; 1872.88,4351.88 2041.7,4183.06 ; 1872.88,4351.88 PC2.2@2040.12,4105.93 ; RN15.2@1872.88,4435.23 1872.88,4529.75 1910.12,4566.99 ; PC2.2@2040.12,4105.93 2041.7,4183.06 ; PC2.2@2040.12,4105.93 2041.7,4183.06
1C17: PC4.1 RL10.3 RN24.2 | length 2562.2
  BottomLayer w80: PC4.1@4571.02,4118.31 4571.02,4218.61 ; PC4.1@4571.46,4106.99 4571.02,4218.61 ; RL10.3@4738.18,4569.76 RL10.3@5022.2,4570.44 RL10.3@4739.08,4558.31 ; RL10.3@5004.56,4558.31 RL10.3@4722.2,4570.44 ; RL10.3@5011.02,4558.31 RL10.3@4711.02,4558.31 ; 4571.02,4218.61 RN24.2@4711.02,4358.61 ; 4571.02,4218.61 RN24.2@4689.84,4365.47 ; RN24.2@4689.84,4365.47 RL10.3@4711.02,4558.31 ; RN24.2@4689.84,4365.47 RL10.3@4722.2,4570.44 ; RN24.2@4711.02,4358.61 RL10.3@4711.02,4558.31 ; RN24.2@4711.02,4358.61 RL10.3@4722.2,4570.44
1C22: PB4.3 RL22.3 RN13.2 | length 738.7
  BottomLayer w80: PB4.3@9849.43,4166.34 9849.43,4596.56 9855.4,4602.53 RL22.3@10155.4,4602.53
1C27: PB4.1 RL21.3 RN12.2 | length 766.8
  BottomLayer w80: PB4.1@9446.27,4185.23 9328.25,4303.25 9328.25,4601.09 9329.69,4602.53 RL21.3@9629.69,4602.53
1C31: PB4.5 RL14.3 RN14.2 | length 790.7
  BottomLayer w80: PB4.5@10249.43,4166.34 10249.43,4289.41 10381.11,4421.1 10381.11,4602.53 RL14.3@10681.11,4602.53
1C32: PB3.5 RL20.3 RN6.2 | length 768.7
  BottomLayer w80: PB3.5@8769.43,4146.34 8769.43,4255.57 8799.71,4285.85 8799.71,4602.53 RL20.3@9099.71,4602.53
1C33: PB3.3 RL19.3 RN5.2 | length 927.7
  BottomLayer w80: 8329.43,4325.9 RN5.2@8250.1,4405.23 ; PB3.3@8369.43,4146.34 8369.43,4285.9 RN5.2@8250.1,4405.23 ; RL19.3@8574,4602.53 8274,4602.53 8250.1,4578.64 RN5.2@8250.1,4405.23
1C34: PB3.1 RL18.3 RN4.2 | length 788.9
  BottomLayer w80: RL18.3@7748.28,4602.53 8048.28,4602.53 7999.84,4554.09 7999.84,4449.17 7969.43,4418.76 PB3.1@7969.43,4146.34
1C35: PB2.5 RL17.3 RN3.2 | length 807.2
  BottomLayer w80: PB2.5@7099.43,4146.34 7099.43,4294.48 7195.87,4390.92 7195.87,4436.81 7210.18,4451.13 7210.18,4590.14 7222.57,4602.53 RL17.3@7522.57,4602.53
1C36: PB2.3 RL16.3 RN2.2 | length 780.5
  BottomLayer w80: PB2.3@6699.43,4146.34 6699.43,4374.55 RN2.2@6668.75,4405.23 6668.75,4574.42 6696.86,4602.53 RL16.3@6996.86,4602.53
1C37: PB2.1 RL15.3 RN1.2 | length 827.3
  BottomLayer w80: RL15.3@6171.15,4602.53 6471.15,4602.53 6470.61,4601.99 RN1.2@6470.61,4449.17 6299.43,4277.99 PB2.1@6299.43,4146.34
2-38: 
2-39: 
2-40: 
2-41: 
3-24: 
3-25: 
3-26: 
3-27: 
3-28: 
3-69: PA1.1 RL30.3 | length 939.8
  BottomLayer w50: RL30.3@2525.1,2590.09 2625.83,2690.82 2625.83,2988.28 2580.44,3033.67 ; PA1.1@2546.62,3174.91 2580.44,3033.67 ; PA1.1@2580.44,3178.9 2580.44,3033.67 ; PA1.1@2614.26,3174.91 2580.44,3033.67
3-70: PA1.2 RL31.3 | length 1306
  BottomLayer w50: PA1.2@2746.49,3176.13 2780.44,2969.84 PA1.2@2814.38,3176.13 ; PA1.2@2780.44,3178.9 2780.44,2815.48 RL31.3@3005.83,2590.09 2860.4,2735.53
3-71: PA1.3 RL32.3 | length 1466.1
  BottomLayer w50: PA1.3@2946.59,3175.1 2980.44,3026.4 ; PA1.3@2980.44,3178.9 2980.44,3026.4 ; PA1.3@3014.28,3175.1 2980.44,3026.4 ; 2980.44,3026.4 2980.44,2822.84 3071.06,2732.22 3348,2732.22 ; 3348,2732.22 RL32.3@3435.5,2590.09 ; 3348,2732.22 3435.5,2644.72 ; RL32.3@3435.5,2590.09 3435.5,2644.72 ; RL32.3@3435.5,2590.09 3435.5,2644.72
3-72: PA1.4 RL33.3 | length 1361.1
  BottomLayer w50: PA1.4@3147.01,3172.36 3180.44,3090.16 ; PA1.4@3180.44,3178.9 3180.44,3090.16 ; PA1.4@3213.86,3172.36 3180.44,3090.16 ; RL33.3@3874.22,2590.09 3874.22,2751.86 3830.76,2795.32 3376.83,2795.32 3374.93,2797.22 3304.03,2797.22 3180.44,2920.81 3180.44,3090.16
10V-面板-温度输入: PA2.2 PAX.16 | length 1935.6
  TopLayer w30: PA2.2@4406.54,3172.39 4450.11,3029.84 PA2.2@4493.68,3172.39 ; PA2.2@4450.11,3178.9 4450.11,2909.66 4475.83,2883.93 5058.65,2883.93 5235.52,2707.06 5235.52,2295.95 5206.87,2267.3 PAX.16@5159.58,2267.3
10V-面板-湿度输入: PA2.3 PAX.15 | length 1687.1
  TopLayer w30: PA2.3@4206.54,3172.39 4250.11,3029.84 PA2.3@4293.68,3172.39 ; PA2.3@4250.11,3178.9 4250.11,2883.93 4299.35,2834.69 4983.37,2834.69 5159.58,2658.47 PAX.15@5159.58,2567.3